# EAGLE board Kinefox_3 (EAGLE 9.6.2)
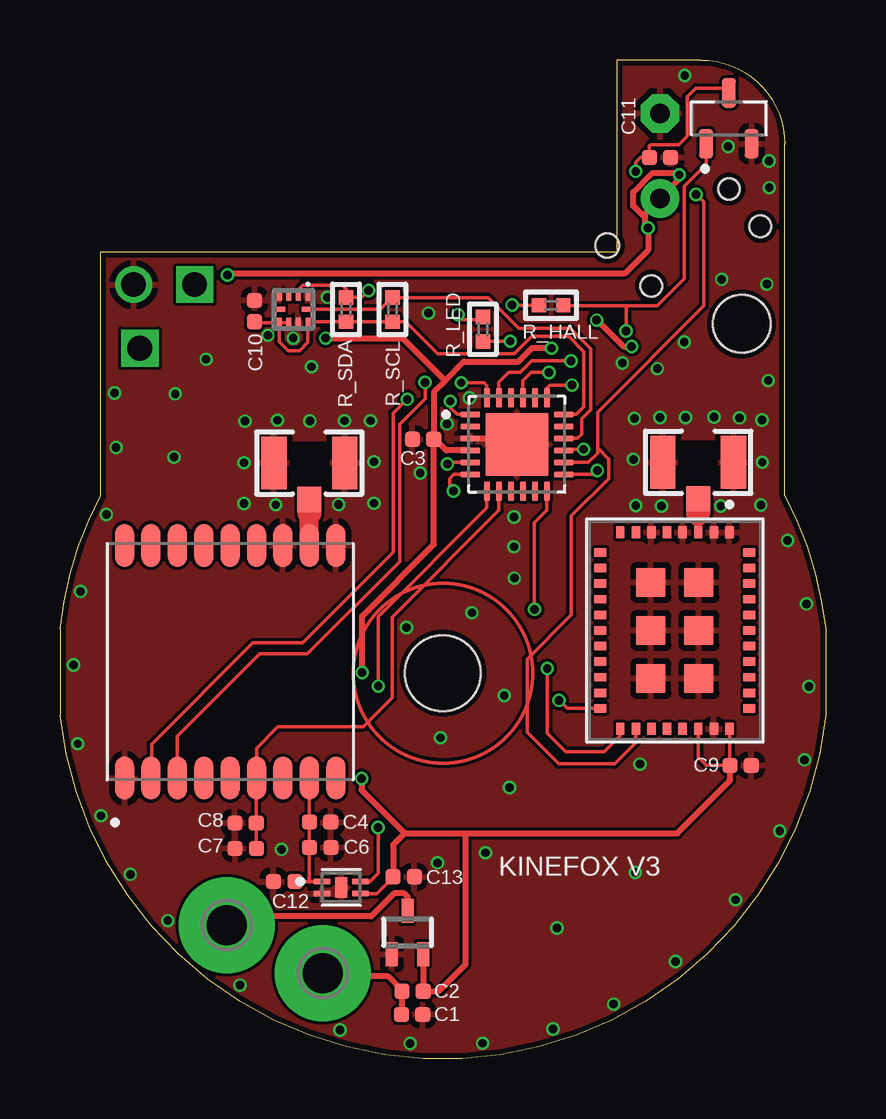
[diagram p0: board, top side]
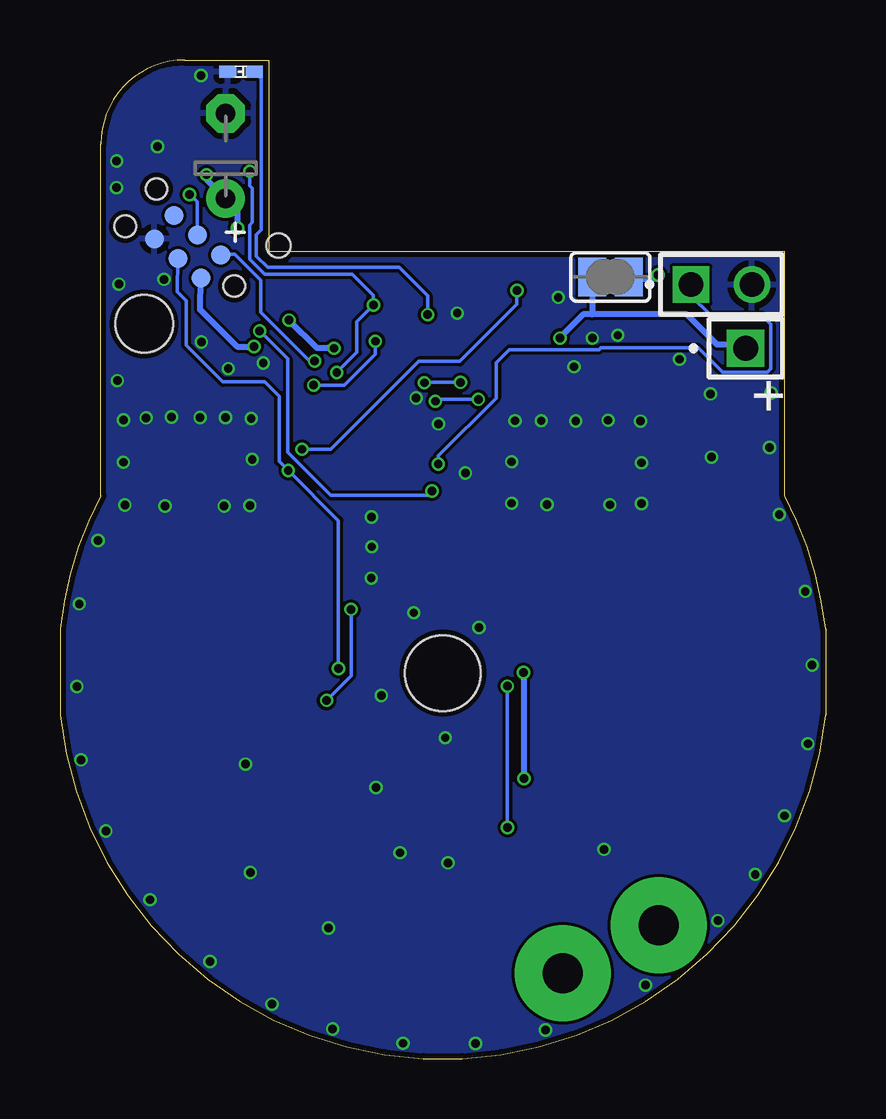
[diagram p1: board, bottom side, seen from below]

Size 31.9 x 41.61 mm. Coordinates in mm from the lower left corner, seen from the top.
Outline: 1.7,23.46 1.7,33.61 23.2,33.61 23.2,41.61 26.7,41.61 arc-90 30.2,38.11 30.2,23.46 arc-22 31.9,17.91 31.9,14.31 arc-168 0,14.31 0,17.91 arc-22 1.7,23.46
Copper layers (1*16): Top 0.0356mm / dielectric 0.1702mm / Bottom 0.0356mm
Design rules "default *": minimum track width 5mil, minimum drill 0.35mm, track to track 5mil, track to pad 5mil, pad to pad 5mil, via to via 5mil, smd to smd 5mil, copper to edge 9mil, drill to drill 6mil, minimum pad ring 4mil, minimum via ring 4mil, stop-mask expansion 0mil, vias tented up to drill 0.35mm, thermal gap 10mil
Holes 3.15 mm at 15.95,16.06
Holes 2.4 mm at 28.4,30.61
Holes 1 mm at 22.8,33.88

## Footprints (pad centres in the part's own frame; a part is rotated, then mirrored left to right if it is on the bottom)
C0402 = smd 0.635 x 0.635: 1 -0.445,0; 2 0.445,0
E3,5-8 = drill 0.813 pad 1.6: + -1.778,0 | drill 0.813 pad 1.6 octagon: - 1.778,0
CMONR_STANDARDPARTS_0402.LED = smd 0.7 x 0.5: P$1 -0.55,0; P$2 0.55,0
TC2030-MCP-NL = smd 0.787 x 0.787: 1 1.27,-0.635; 2 1.27,0.635; 3 2.54,-0.635; 4 2.54,0.635; 5 3.81,-0.635; 6 3.81,0.635 | hole 0.889: 0,0; 5.08,-1.016; 5.08,1.016
SAMTEC_HMTSW-102-XX-X-S-XXX = drill 1.02 square: 01 1.27,0 | drill 1.02: 02 -1.27,0
SAMTEC_SSW-101-01-S-S = drill 1.04 pad 1.39 square: 01 0,0
SON50P120X160X60-5N = smd 0.71 x 0.27: 1 -0.795,0.25; 2 -0.795,-0.25; 3 0.795,-0.25; 4 0.795,0.25 | smd 0.5 x 0.86: 5 0,0
2,54/1,1 = drill 1.651 pad 3.988: 1 0,0
MICROBUILDER__0402 = smd 0.6 x 0.6: 1 -0.508,0; 2 0.508,0
SJ = smd 1.168 x 1.6: 1 -0.762,0; 2 0.762,0
QFN50P400X400X90-25N = smd 0.81 x 0.26: 1 -1.95,1.25; 2 -1.95,0.75; 3 -1.95,0.25; 4 -1.95,-0.25; 5 -1.95,-0.75; 6 -1.95,-1.25; 13 1.95,-1.25; 14 1.95,-0.75; 15 1.95,-0.25; 16 1.95,0.25; 17 1.95,0.75; 18 1.95,1.25 | smd 0.26 x 0.81: 7 -1.25,-1.95; 8 -0.75,-1.95; 9 -0.25,-1.95; 10 0.25,-1.95; 11 0.75,-1.95; 12 1.25,-1.95; 19 1.25,1.95; 20 0.75,1.95; 21 0.25,1.95; 22 -0.25,1.95; 23 -0.75,1.95; 24 -1.25,1.95 | smd 2.6 x 2.6: 25 0,0
SOT323 = smd 0.5 x 1: 1 0,0.9; 2 -0.65,-0.9; 3 0.65,-0.9
SOT95P237X112-3N = smd 1.23 x 0.59: 1 -1.06,0.95; 2 -1.06,-0.95; 3 1.06,0
XCVR_L70B-M39 = smd 1.8 x 0.8: 1 -4.85,4.4; 2 -4.85,3.3; 3 -4.85,2.2; 4 -4.85,1.1; 5 -4.85,0; 6 -4.85,-1.1; 7 -4.85,-2.2; 8 -4.85,-3.3; 9 -4.85,-4.4; 10 4.85,-4.4; 11 4.85,-3.3; 12 4.85,-2.2; 13 4.85,-1.1; 14 4.85,0; 15 4.85,1.1; 16 4.85,2.2; 17 4.85,3.3; 18 4.85,4.4
MC3635 = smd 0.2 x 0.4: 1 -0.6,-0.55; 2 -0.2,-0.55; 3 0.2,-0.55; 4 0.6,-0.55; 6 0.6,0.55; 7 0.2,0.55; 8 -0.2,0.55; 9 -0.6,0.55 | smd 0.4 x 0.2: 5 0.55,0; 10 -0.55,0
U.FL = smd 2.2 x 1.05: 1 0,1.475; 2 0,-1.475 | smd 1.05 x 1: 3 1.525,0
IC_AX-SIP-SFEU-1-01-TX30 = smd 0.5 x 0.35: 1 -4.1,2.275; 2 -4.1,1.625; 3 -4.1,0.975; 4 -4.1,0.325; 5 -4.1,-0.325; 6 -4.1,-0.975; 7 -4.1,-1.625; 8 -4.1,-2.275; 20 4.1,-2.275; 21 4.1,-1.625; 22 4.1,-0.975; 23 4.1,-0.325; 24 4.1,0.325; 25 4.1,0.975; 26 4.1,1.625; 27 4.1,2.275 | smd 0.35 x 0.5: 9 -3.25,-3.1; 10 -2.6,-3.1; 11 -1.95,-3.1; 12 -1.3,-3.1; 13 -0.65,-3.1; 14 0,-3.1; 15 0.65,-3.1; 16 1.3,-3.1; 17 1.95,-3.1; 18 2.6,-3.1; 19 3.25,-3.1; 28 3.25,3.1; 29 2.6,3.1; 30 1.95,3.1; 31 1.3,3.1; 32 0.65,3.1; 33 0,3.1; 34 -0.65,3.1; 35 -1.3,3.1; 36 -1.95,3.1; 37 -2.6,3.1; 38 -3.25,3.1 | smd 1.2 x 1.2: P1 -2,1; P2 -2,-1; P3 0,-1; P4 2,-1; P5 2,1; P6 0,1

## Placement (x,y rotation side)
C1  22uF  [C0402]  14.67,1.84 180 top
C2  22uF  [C0402]  14.69,2.81 0 top
C3  0.1uF  [C0402]  15.13,25.81 180 top
C4  0.1uF  [C0402]  10.84,9.86 0 top
C5  [E3,5-8]  25,37.61 90 bottom
C6  10uF  [C0402]  10.84,8.8 0 top
C7  0.1uF  [C0402]  7.74,8.76 180 top
C8  4.7uF  [C0402]  7.73,9.82 180 top
C9  4.7uF  [C0402]  28.36,12.22 0 top
C10  0.1uF  [C0402]  8.11,31.15 90 top
C11  0.1uF  [C0402]  25,37.55 180 top
C12  0.1uF  [C0402]  9.34,7.38 180 top
C13  1uF  [C0402]  14.32,7.58 180 top
D_LED_GREEN  GREEN  [CMONR_STANDARDPARTS_0402.LED]  24.36,41.13 180 bottom
J1  [TC2030-MCP-NL]  24.64,32.19 140 bottom
J2  HMTSW-102  [SAMTEC_HMTSW-102-XX-X-S-XXX]  4.34,32.25 180 bottom
J3  SSW-101-01-S-S  [SAMTEC_SSW-101-01-S-S]  3.33,29.6 0 bottom
LS  SIP32431DNP3-T1GE4  [SON50P120X160X60-5N]  11.72,7.13 0 top
PAD1  WIREPAD2,54/1,1  [2,54/1,1]  6.95,5.56 0 top
PAD2  WIREPAD2,54/1,1  [2,54/1,1]  10.95,3.56 0 top
R_HALL  10k  [MICROBUILDER__0402]  20.46,31.39 0 top
R_LED  1k  [MICROBUILDER__0402]  17.62,30.39 270 top
R_SCL  4.7k  [MICROBUILDER__0402]  13.85,31.21 90 top
R_SDA  4.7k  [MICROBUILDER__0402]  11.92,31.21 90 top
SJ1  [SJ]  8.97,32.57 180 bottom
U1  ATTINY3217-MFR  [QFN50P400X400X90-25N]  19.04,25.59 0 top
U2  BAT854SW  [SOT323]  14.48,5.26 0 top
U3  MAX6375UR31-T  [SOT95P237X112-3N]  27.87,39.18 90 top
U4  L70B-M39  [XCVR_L70B-M39]  7.09,16.54 90 top
UACC  MC3635  [MC3635]  9.73,31.22 180 top
UFL  U.FL-R-SMT-1(60)  [U.FL]  26.59,24.85 270 top
UFL1  U.FL-R-SMT-1(60)  [U.FL]  10.39,24.82 270 top
USIG  AX-SIP-SFEU-1-01-TX30  [IC_AX-SIP-SFEU-1-01-TX30]  25.62,17.84 270 top

## Library data of the parts
C1 C2 C9-C13 = TSEM; FARNELL_OC: 2210758; MF: TDK; MPN: CGA2B2C0G1H080D050BA
C3 C4 C6-C8 = TSEM; FARNELL_OC: 2210758; MF: TDK; MPN: CGA2B2C0G1H080D050BA; VALUE: 8pF
C5 = qfm-trx1-24g
D_LED_GREEN R_HALL R_LED R_SCL R_SDA = TinyPICO
J1 = tag-connect
J2 = HMTSW-102-XX-X-S-XXX; AVAILABILITY: In Stock; DESCRIPTION: Conn Unshrouded Header HDR 2 POS 2.54mm Solder ST Top Entry Thru-Hole Bulk; MF: Samtec; MP: HMTSW-102-06-T-S-000; PACKAGE: None; PRICE: None; PURCHASE-URL: https://pricing.snapeda.com/search/part/HMTSW-102-06-T-S-000/?ref=eda
J3 = SSW-101-01-S-S; AVAILABILITY: In Stock; DESCRIPTION: 1 Position Receptacle Connector - Through Hole Gold; MF: Samtec Inc.; MP: SSW-101-01-S-S; PACKAGE: None; PRICE: None; PURCHASE-URL: https://pricing.snapeda.com/search/part/SSW-101-01-S-S/?ref=eda
LS = SIP32431DNP3-T1GE4; AVAILABILITY: In Stock; DESCRIPTION: Power Switch/Driver 1:1 P-Channel 1.4A 4-TDFN (1.2x1.6); MF: Vishay Siliconix; MP: SIP32431DNP3-T1GE4; PACKAGE: UFDFN-4 Vishay Siliconix; PRICE: None; PURCHASE-URL: https://pricing.snapeda.com/search/part/SIP32431DNP3-T1GE4/?ref=eda
PAD1 PAD2 = wirepad_custom
SJ1 = jumper
U1 = ATTINY3217-MFR; AVAILABILITY: In Stock; DESCRIPTION: AVR tinyAVR™ 1, Functional Safety (FuSa) Microcontroller IC 8-Bit 16MHz 32KB (32K x 8) FLASH 24-VQFN (4x4); MF: Microchip; MP: ATTINY3217-MFR; PACKAGE: VFQFN-24 Microchip Technology; PRICE: None; PURCHASE-URL: https://pricing.snapeda.com/search/part/ATTINY3217-MFR/?ref=eda
U2 = BAT854SW; AVAILABILITY: Bad; DESCRIPTION: Diode Array 1 Pair Series Connection Schottky 40V 200mA (DC) Surface Mount SC-70, SOT-323; MF: NXP Semiconductors; MP: BAT854SW; PACKAGE: None; PRICE: None
U3 = MAX6375UR31-T; AVAILABILITY: In Stock; DESCRIPTION: IC SUPERVISOR UL LO PWR VOLT DET; MF: Maxim Integrated; MP: MAX6375UR31; PACKAGE: SOT-23-3 Maxim Integrated; PRICE: None; PURCHASE-URL: https://pricing.snapeda.com/search/part/MAX6375UR31/?ref=eda
U4 = L70B-M39; AVAILABILITY: In Stock; DESCRIPTION: L70, an SMD type module, brings the high performance of MTK positioning engine to the industrial applications with compact profile, ultra low power consumption and fast positioning capability.; MF: Quectel; MP: L70B-M39; PACKAGE: None; PRICE: None; PURCHASE-URL: https://pricing.snapeda.com/search/part/L70B-M39/?ref=eda
UACC = MC3635; ARROW_PART_NUMBER: MC3635; ARROW_PRICE-STOCK: https://www.arrow.com/en/products/mc3635/mcube-inc; DESCRIPTION: Accelerometers Digital Output 3 Axis Acceleronmeter; HEIGHT: 0.94mm; MANUFACTURER_NAME: mCube; MANUFACTURER_PART_NUMBER: MC3635; MOUSER_PART_NUMBER: 498-MC3635; MOUSER_PRICE-STOCK: https://www.mouser.co.uk/ProductDetail/mCube/MC3635?qs=xIT89idmjZlQ0wKEjJ43VQ%3D%3D
UFL UFL1 = UFL
USIG = AX-SIP-SFEU-1-01-TX30-V2; AVAILABILITY: In Stock; DESCRIPTION: Sigfox Transceiver Module 868.13MHz, 869.525MHz Antenna Not Included Surface Mount; MF: ON Semiconductor; MP: AX-SIP-SFEU-1-01-TX30; PACKAGE: SIP-38 ON Semiconductor; PRICE: None

## Nets
AC1: PAD1.1 U2.1
AC2: C1.2 C2.1 PAD2.1
ANT_GNSS: U4.11 UFL1.3
ANT_SIGFOX: UFL.3 USIG.3
GND: C1.1 C3.2 C4.2 C5.- C6.2 C7.2 C8.2 C9.2 C10.2 C11.1 C12.2 C13.1 D_LED_GREEN.P$2 J1.6 J2.02 LS.2 LS.5 U1.3 U1.25 U2.2 U3.2 U4.1 U4.10 U4.12 UACC.1 UACC.4 UACC.8 UFL1.1 UFL1.2 UFL.1 UFL.2 USIG.1 USIG.2 USIG.4 USIG.6 USIG.26 USIG.P1 USIG.P2 USIG.P3 USIG.P4 USIG.P5 USIG.P6
GPS_BCK: C7.1 C8.1 U1.8 U4.6
GPS_ON: LS.4 U1.7
HALL: R_HALL.2 U1.6 U3.1
LED_GREEN: R_LED.2 U1.19
N$1: D_LED_GREEN.P$1 R_LED.1
POWER: C10.1 R_SCL.1 R_SDA.1 U1.18 UACC.6 UACC.7 UACC.9
POWER_HALL: C11.2 R_HALL.1 U1.21 U3.3
PWR_GPS: C4.1 C6.1 C12.1 LS.1 U4.8
RXD: J1.4 U1.13 USIG.20
RXD2: U1.1 U4.2
SCL: R_SCL.2 U1.16 UACC.10
SDA: R_SDA.2 U1.15 UACC.2
START: J2.01 U1.5
TXD: J1.3 U1.14 USIG.21
TXD2: U1.24 U4.3
UPDI: J1.1 U1.23
V_LIC: C5.+ SJ1.1
VCC: C2.2 C3.1 C9.1 C13.2 J1.2 J3.01 LS.3 SJ1.2 U1.4 U2.3 USIG.25 USIG.27
WAKEUP: U1.12 USIG.19

## Tracks (layer width: path | path; a pad name or v marks a point on that pad's centre or on a via)
AC1
  Top 0.254: U2.1 14.48,6.75 14.34,6.89 13.92,6.89 12.96,5.93 7.32,5.93 PAD1.1
AC2
  Top 0.254: PAD2.1 11.08,3.43 13.67,3.43 14.25,2.85 C2.1 14.25,1.86 C1.2
ANT_GNSS
  Top 0.8: U4.11 10.39,22.73
  Top 1: UFL1.3 10.39,22.73
ANT_SIGFOX
  Top 0.35: USIG.3 26.59,22.56 26.6,22.56 26.6,22.57 26.67,22.57 26.67,22.79 26.59,22.71
  Top 1: UFL.3 26.59,22.71
GND  (via drill 0.35)
  Top 0.254: U1.3 18.79,25.84 U1.25
  other vias: 9.72,30.02 11.14,31.72 29.51,28.25 29.25,26.61 30.32,21.59 31.1,18.95 31.2,15.51 31.02,12.45 29.99,9.49 28.15,6.62 25.65,4.05 23.07,2.27 20.54,1.23 17.61,0.64 14.59,0.63 11.67,1.19 7.5,3.06 4.49,5.75 2.93,7.68 1.71,10.12 0.74,13.12 0.56,16.4 0.85,19.47 1.93,22.67 2.27,27.74 15.01,24.4 16.13,26.45 18.92,22.57 18.91,21.33 17.06,27.53 9.23,8.72 2.34,25.46 15.85,13.37 18.51,15.13 17.16,18.58 14.44,17.96 24.17,12.27 17.73,8.58 18.93,20.02 7.67,23.13 7.67,24.83 7.71,26.56 9.06,26.6 10.41,26.57 11.85,26.58 12.94,26.58 13.08,24.87 13.08,23.14 11.61,23.09 8.99,23.08 23.99,23.05 23.89,24.97 23.93,26.67 25,26.71 27.25,26.74 28.31,26.7 29.26,24.85 29.2,23.07 27.53,23.03 24.89,28.75 26.01,29.86 27.57,32.47 25.06,23.03 26.06,26.71 29.45,32.27 23.43,28.98 15.35,31.06 6.09,29.14 4.8,27.7 29.54,37.4 29.55,36.29 27.84,38.01 26.03,40.96 15.73,8.16 10.48,28.83 8.66,30.14 20.71,5.44 23.97,7.76 18.73,11.3 4.75,25.06
  pour Top: -2.84,47.57 -2.84,-2.08 33.39,-2.08 33.39,47.57
  pour Bottom: -1.33,47.8 -1.33,-0.9 33.36,-0.9 33.36,47.8
GPS_BCK
  Top 0.152: C7.1 C8.1 8.17,11.67 U4.6 8.19,12.94 9.08,13.83 12.64,13.83 13.84,15.03 13.84,18.39 13.94,18.49 18.29,22.84 U1.8
GPS_ON  (via drill 0.35)
  Top 0.152: U1.7 17.79,22.95 13.26,18.42 v13.26,15.52 | v13.25,9.63 13.25,7.72 12.9,7.38 LS.4
  Bottom 0.152: v13.26,15.52 v13.26,9.64 v13.25,9.63
HALL  (via drill 0.35)
  Top 0.152: U3.1 26.92,37.27 26,36.35 26,32.5 24.89,31.38 23.59,31.38 | R_HALL.2 23.59,31.38 | 23.59,31.38 v23.59,30.33 v23.58,30.32 | v16.4,23.65 16.24,23.81 16.24,24.17 16.41,24.34 U1.6
  Bottom 0.152: v23.58,30.32 22.42,29.16 22.42,25.27 20.62,23.47 16.58,23.47 v16.4,23.65
LED_GREEN  (via drill 0.35)
  Top 0.152: v21.33,28.06 20.41,28.06 20.29,27.94 U1.19 | v18.76,29.89 17.63,29.89 R_LED.2
  Bottom 0.152: v21.33,28.06 20.05,28.06 18.76,29.35 v18.76,29.89
N$1  (via drill 0.35)
  Top 0.152: R_LED.1 17.51,30.79 16.79,30.79 v16.58,31
  Bottom 0.152: v16.58,31 16.58,31.78 17.77,32.96 23.25,32.96 23.72,33.43 23.72,34.33 23.51,34.54 23.51,39.93 23.51,40.83 D_LED_GREEN.P$1
POWER
  Top 0.152: UACC.6 8.15,30.67 C10.1 | UACC.7 UACC.6 | UACC.6 9.14,29.86 9.5,29.5 9.98,29.5 10.33,29.85 UACC.9 10.36,30.7 R_SDA.1 R_SCL.1 14.41,30.7 15.74,29.37 18.93,29.37 19.65,30.09 21.2,30.09 21.83,29.46 21.83,27.17 21.51,26.85 U1.18
POWER_HALL  (via drill 0.35)
  Top 0.152: U1.21 19.29,28.24 19.64,28.59 v20.37,28.59 | v23.99,36.97 23.99,37.34 24.2,37.55 C11.2 24.55,38.03 24.61,38.08 25.78,38.08 26.13,38.43 26.13,40.08 26.49,40.44 27.67,40.44 U3.3 | v18.84,31.4 R_HALL.1
  Bottom 0.152: v20.37,28.59 19.53,29.43 19.53,30.71 v18.84,31.4 18.84,31.8 19.73,32.69 23.37,32.69 24,33.32 24,34.72 23.88,34.84 23.88,36.27 23.99,36.38 v23.99,36.97
PWR_GPS
  Top 0.152: U4.8 C4.1 C6.1 10.39,7.43 10.34,7.38 | C12.1 10.34,7.38 | 10.34,7.38 LS.1
RXD  (via drill 0.35)
  Top 0.152: v22.39,24.51 22.22,24.34 U1.13 | USIG.20 23.34,13.46 22.68,12.79 21.07,12.79 20.31,13.55 v20.31,16.25 v20.3,16.26
  Bottom 0.152: J1.4 27.01,31.95 26.64,31.58 26.64,29.73 25.11,28.2 23.38,28.2 22.77,27.59 22.77,24.89 v22.39,24.51 20.3,22.42 v20.3,16.26
RXD2  (via drill 0.35)
  Top 0.152: U4.2 3.82,11.72 3.82,13.1 8.04,17.32 10.11,17.32 13.88,21.09 13.88,26.9 14.45,27.47 v14.47,27.47 | U1.1 16.55,26.84 16.26,27.13 v16.26,27.39
  Bottom 0.152: v16.26,27.39 16.17,27.48 14.55,27.48 14.54,27.47 v14.47,27.47
SCL
  Top 0.152: UACC.10 13.35,31.21 R_SCL.2 13.85,31.7 17.85,31.7 19.12,30.43 21.26,30.43 22.12,29.57 22.12,27.03 21.74,26.66 21.74,26.02 21.56,25.84 U1.16
SDA  (via drill 0.35)
  Top 0.152: UACC.2 9.93,32.03 10.12,32.22 11.77,32.22 11.92,32.07 R_SDA.2 12.57,31.72 v12.86,32.01 | U1.15 21.04,25.39 v21.82,25.39
  Bottom 0.152: v21.82,25.39 20.62,25.39 16.96,29.05 15.24,29.05 12.86,31.43 v12.86,32.01
START  (via drill 0.35)
  Top 0.152: U1.5 16.2,24.84 v16.14,24.78
  Bottom 0.152: J2.01 5.61,31.79 4.79,30.97 2.66,30.97 2.29,30.6 2.29,28.74 2.43,28.61 4.29,28.61 5.3,29.62 9.36,29.62 9.44,29.54 13.18,29.54 13.73,28.99 13.73,27.52 16.14,25.11 v16.14,24.78
TXD  (via drill 0.35)
  Top 0.152: 22.4,25.45 22.4,25.22 22.02,24.84 U1.14 | 22.4,25.45 22.87,24.98 22.87,24.17 21.31,22.61 21.31,18.5 19.46,16.65 19.46,13.6 20.78,12.28 23.11,12.28 24,13.16 USIG.21 | v26.5,36.01 v26.51,36.01 26.82,35.7 26.82,31.36 22.4,26.94 22.4,25.45
  Bottom 0.152: v26.5,36.01 26.48,36.01 26.18,35.7 J1.3
TXD2  (via drill 0.35)
  Top 0.152: U4.3 4.89,13.43 8.32,16.86 10.31,16.86 14.16,20.71 14.16,26.44 15.21,27.49 v15.21,28.18 | U1.24 17.79,28.04 17.67,28.16 v16.72,28.16
  Bottom 0.152: v15.21,28.18 16.7,28.18 v16.72,28.16
UPDI  (via drill 0.35)
  Top 0.152: U1.23 18.29,28.19 18.7,28.6 19.18,28.6 19.65,29.07 v21.29,29.07
  Bottom 0.152: v21.29,29.07 21.51,29.07 23.54,31.1 23.54,32.43 24.62,33.51 25.18,33.51 J1.1
V_LIC  (via drill 0.35)
  Top 0.254: v6.98,32.65 7.04,32.71 23.53,32.71 24.5,33.68 v24.5,34.61 24.38,34.73 24.38,35.03 | 24.38,35.03 24.38,35.21 C5.+ 25.8,36.63 v25.8,36.83 25.8,36.85 25.74,36.91 24.68,36.91 23.88,36.11 23.88,35.53 24.38,35.03
  Bottom 0.254: SJ1.1 8.14,32.5 7.13,32.5 v6.98,32.65 | v24.5,34.61 24.5,35.32 C5.+ 25.8,36.63 v25.8,36.83
VCC  (via drill 0.35)
  Top 0.152: C13.2 13.88,7.55 13.21,6.88 LS.3 | USIG.25 26.59,12.55 26.93,12.22 C9.1 27.91,13.72
  Top 0.254: U1.4 16.09,25.34 15.77,25.66 15.72,25.66 C3.1 | 16.05,28.25 16.83,29.04 19.1,29.04 19.66,29.6 v20.48,29.6 | 16.05,28.25 15.57,27.78 C3.1 | C3.1 15.57,21.42 12.59,18.44 v12.59,16.09 | v23.82,29.67 23.48,29.67 22.38,30.77 v22.36,30.77 | U2.3 C2.2 15.78,2.81 16.9,3.93 16.9,9.39 | C9.1 27.91,11.58 25.72,9.39 16.9,9.39 | USIG.27 27.91,13.72 | C13.2 13.88,8.91 14.36,9.39 | 14.36,9.39 12.57,11.19 v12.57,11.67 | 14.36,9.39 16.9,9.39 | 16.05,28.25 14.28,30.02 v11.07,30.02
  Bottom 0.254: J1.2 26.04,32.52 26.06,31.21 24.52,29.67 v23.82,29.67 | v12.59,16.09 12.57,16.07 v12.57,11.67 | v22.36,30.77 21.19,29.6 v20.48,29.6 | SJ1.2 9.73,31.01 | v11.07,30.02 11.07,30.04 10.1,31.01 9.73,31.01 | 9.73,31.01 5.78,31.01 4.52,29.75 3.48,29.75 J3.01
WAKEUP  (via drill 0.35)
  Top 0.152: USIG.19 21.13,14.59 v20.79,14.93 | U1.12 20.29,22.84 19.77,22.32 v19.77,18.72
  Bottom 0.152: v19.77,18.72 19.77,15.95 v20.79,14.93
(copper drawn outside any net)
  shapes: Top circle x1

## Text on the board
tNames: KINEFOX V3
bNames: +